# Altium PCB PAY_IFP_V1.PcbDoc (part 3 of 5)
Units mil, origin at the board's own origin, x right, y up, seen from the top; angles counter-clockwise.
Board outline 3661.42 x 3543.31 mil, 6 copper layers (L1 TOP, L2 GND 1, L3 SIGNAL, L4 PWR, L5 GND 2, L6 BOT), stack 59.685 mil thick; 511 components, 371 nets, 2264 pads, 383 vias.
Unrouted connection lines stored in the file: 1001.
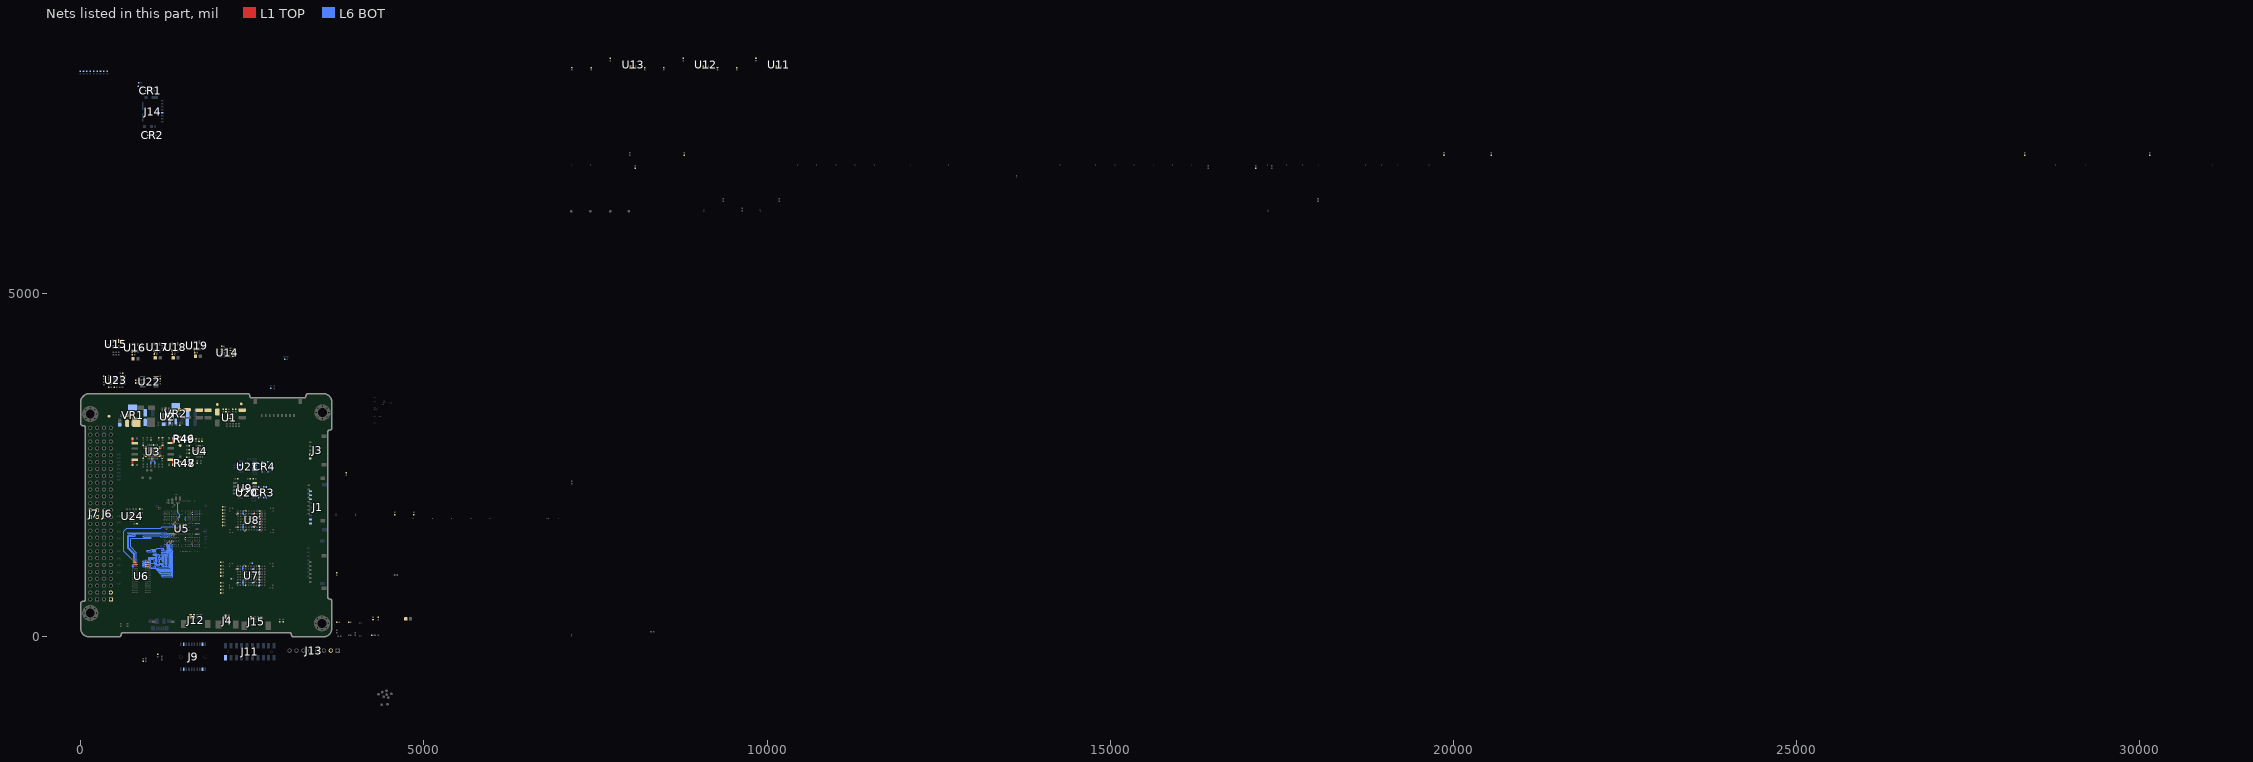
[diagram p2: the nets of this part, all layers, seen from the top]

## Via types
v1: diameter 13.78, hole 5.91, L1 TOP to L6 BOT, 276 vias
v2: diameter 13.78, hole 7.87, L1 TOP to L6 BOT, 71 vias
v3: diameter 15.75, hole 7.87, L1 TOP to L6 BOT, 25 vias
v4: diameter 15.75, hole 7.87, L1 TOP to L6 BOT, tented both sides, 9 vias
v5: diameter 13.78, hole 7.87, L1 TOP to L6 BOT, tented both sides, 2 vias

## Nets (pads, with @x,y where several pads share a name; then routed paths per layer and width w, separated by ;. In a path a pad name is that pad's centre, name@x,y a point inside that pad or via, vN(x,y) a via of type N, cw(c..) or ccw(c..) an arc to the next point about the centre after c; other vN are vias at no path point) (continued)
DCDC4: (continued)
  L1 TOP w31.5: L5.2@1314.37,2824.8 1343.9,2824.8 1348.19,2829.1 C32.1@1348.19,2893.7
DDR_A0: U5.W6 U6.N3 | length 1341.6
  L1 TOP w4.92: U6.N3@948.49,1024.02 v1(964.24,1039.77) ; v1(1335.3,1357.68) U5.W6@1348.09,1370.48
  L6 BOT w4.92: v1(964.24,1039.77) 960.3,1043.7 911.09,1043.7 907.15,1039.77 907.15,1027.96 911.09,1024.02 997.7,1024.02 1003.61,1024.02 1010.5,1017.13 1010.5,1007.29 1021.32,996.46 1084.31,996.46 1163.06,917.72 1292.98,917.72 1296.91,913.78 1296.91,901.97 1292.98,898.04 1186.68,898.04 1182.74,894.1 1182.74,882.29 1186.68,878.35 1340.22,878.35 1344.16,882.29 1344.16,1244.49 1335.3,1253.35 1335.3,1283.36 1337.11,1285.17 1337.11,1346.46 1336.99,1346.57 1336.99,1355.99 v1(1335.3,1357.68)
DDR_A1: U5.P6 U6.P7 | length 1340.7
  L1 TOP w4.92: v1(806.76,1039.77) U6.P7@822.5,1055.52 ; v1(1335.3,1485.63) U5.P6@1348.09,1498.43
  L6 BOT w3.94: 1280.53,1474.31 1302.52,1474.31 1304,1472.84 1315.42,1472.84 1315.91,1473.33 1323,1473.33 v1(1335.3,1485.63)
  L6 BOT w4.92: v1(806.76,1039.77) 812.66,1045.67 812.66,1228.74 729.98,1311.42 729.98,1429.53 733.92,1433.47 1021.32,1433.47 1025.26,1437.41 1025.26,1449.22 1021.32,1453.15 918.96,1453.15 915.02,1457.09 915.02,1468.9 918.96,1472.84 1155.18,1472.84 1166.99,1461.03 1261.48,1461.03 1274.77,1474.31 1280.53,1474.31
DDR_A2: U5.V5 U6.P3 | length 1340.7
  L1 TOP w4.92: U6.P3@948.49,1055.52 948.49,1068.31 951.44,1071.26 v1(964.24,1071.26) ; v1(1309.71,1383.27) U5.V5@1322.5,1396.07
  L6 BOT w4.92: v1(964.24,1071.26) 960.3,1075.2 911.09,1075.2 907.15,1071.26 907.15,1059.45 911.09,1055.52 1012.46,1055.52 1027.23,1070.28 1061.68,1070.28 1076.44,1055.52 1096.13,1055.52 1115.81,1035.83 1143.37,1035.83 1163.06,1055.52 1170.93,1055.52 1178.8,1047.64 1178.8,1035.83 1186.68,1027.96 1292.98,1027.96 1296.91,1024.02 1296.91,1012.21 1292.98,1008.27 1135.5,1008.27 1131.56,1004.33 1131.56,992.52 1135.5,988.59 1308.72,988.59 1312.66,992.52 1312.66,1224.81 1304.79,1232.68 1304.79,1260.24 1295.93,1269.1 1295.93,1320.2 1298.66,1322.94 1298.66,1363.59 1297.68,1364.58 1297.68,1371.24 v1(1309.71,1383.27)
DDR_A3: U5.V6 U6.N2 | length 1340
  L1 TOP w4.92: U6.N2@979.98,1024.02 v1(995.73,1039.77) ; v1(1334.32,1383.68) 1335.01,1383.68 1347.4,1396.07 U5.V6@1348.09,1396.07
  L6 BOT w4.92: v1(995.73,1039.77) 1014.43,1039.77 1020.34,1033.86 1020.34,1015.16 1027.23,1008.27 1064.63,1008.27 1072.5,1016.15 1072.5,1031.89 1076.44,1035.83 1092.19,1035.83 1096.13,1031.89 1096.13,1008.27 1127.62,976.78 1143.37,961.03 1151.24,961.03 1163.06,972.84 1308.72,972.84 1312.66,968.9 1312.66,957.09 1308.72,953.15 1166.99,953.15 1163.06,949.22 1163.06,937.41 1166.99,933.47 1304.79,933.47 1308.72,929.53 1308.72,898.04 1312.66,894.1 1324.47,894.1 1328.41,898.04 1328.41,1232.68 1320.54,1240.55 1320.54,1268.11 1306.76,1281.89 1306.76,1317.11 1308.5,1318.86 1308.5,1356.48 1334.32,1382.29 v1(1334.32,1383.68)
DDR_A4: U5.R6 U6.P8 | length 1327.9
  L1 TOP w4.92: v1(775.26,1039.77) U6.P8@791.01,1055.52 ; U5.R6@1348.09,1472.84 v1(1360.89,1485.63)
  L6 BOT w4.92: v1(775.26,1039.77) 775.26,1027.96 770.34,1023.04 754.59,1023.04 751.71,1025.92 751.71,1036.4 771.81,1056.5 782.15,1056.5 790.52,1064.87 790.52,1085.53 785.1,1090.95 785.1,1213 698.49,1299.61 698.49,1459.06 704.39,1464.96 789.04,1464.96 792.98,1468.9 792.98,1480.71 789.04,1484.65 777.23,1484.65 773.29,1488.59 773.29,1500.4 777.23,1504.33 1163.06,1504.33 1182.74,1484.65 1253.61,1484.65 1268.37,1499.41 1302.32,1499.41 1303.8,1500.89 1315.62,1500.89 1316.6,1499.91 1346.62,1499.91 v1(1360.89,1485.63)
DDR_A5: U5.W4 U6.P2 | length 1340.5
  L1 TOP w4.92: U6.P2@979.98,1055.52 992.78,1055.52 995.73,1058.47 v1(995.73,1071.26) ; v1(1284.39,1357.68) 1293.96,1357.68 1296.91,1360.63 U5.W4@1296.91,1370.48
  L6 BOT w4.92: v1(995.73,1071.26) 1007.54,1071.26 1020.34,1084.06 1020.34,1125.4 1029.2,1134.26 1060.69,1134.26 1072.5,1122.44 1072.5,1087.01 1088.25,1071.26 1104,1071.26 1119.75,1055.52 1135.5,1055.52 1155.18,1075.2 1186.68,1075.2 1194.55,1067.33 1194.55,1047.64 1198.49,1043.7 1214.24,1043.7 1218.17,1047.64 1218.17,1177.56 1222.11,1181.5 1233.92,1181.5 1237.86,1177.56 1237.86,1047.64 1241.8,1043.7 1253.61,1043.7 1257.54,1047.64 1257.54,1177.56 1261.48,1181.5 1273.29,1181.5 1277.23,1177.56 1277.23,1047.64 1281.17,1043.7 1292.98,1043.7 1296.91,1047.64 1296.91,1216.93 1292.98,1220.87 1292.98,1251.65 1284.39,1260.24 v1(1284.39,1357.68)
DDR_A6: U5.P7 U6.R8 | length 1338.9
  L1 TOP w4.92: v1(775.26,1071.26) 787.07,1071.26 791.01,1075.2 U6.R8@791.01,1087.01 ; v1(1360.89,1511.22) U5.P7@1373.69,1498.43
  L6 BOT w4.92: v1(775.26,1071.26) 775.26,1087.01 773.29,1088.98 773.29,1201.18 686.68,1287.8 686.68,1475.79 691.6,1480.71 752.62,1480.71 757.54,1485.63 757.54,1495.48 752.62,1500.4 692.58,1500.4 686.68,1506.3 686.68,1514.18 692.58,1520.08 1243.76,1520.08 1253.11,1510.73 1256.55,1510.73 1257.54,1509.75 1298.74,1509.75 1299.72,1510.73 1319.7,1510.73 1320.68,1509.75 1339.24,1509.75 1340.72,1511.22 v1(1360.89,1511.22)
DDR_A7: U5.W2 U6.R2 | length 1336.1
  L1 TOP w3.94: v1(1233.92,1358.67) U5.W2@1245.73,1370.48
  L1 TOP w4.92: U6.R2@979.98,1087.01 979.98,1099.81 982.94,1102.76 v1(995.73,1102.76)
  L6 BOT w4.92: v1(995.73,1102.76) 995.73,1156.89 1000.65,1161.81 1096.13,1161.81 1100.06,1165.75 1100.06,1181.5 1096.13,1185.44 1064.63,1185.44 1060.69,1189.37 1060.69,1201.18 1064.63,1205.12 1096.13,1205.12 1100.06,1209.06 1100.06,1220.87 1096.13,1224.81 1064.63,1224.81 1060.69,1228.74 1060.69,1240.55 1064.63,1244.49 1088.25,1244.49 1092.19,1248.43 1092.19,1260.24 1088.25,1264.18 1052.82,1264.18 1048.88,1260.24 1048.88,1250.4 1039.04,1240.55 970.14,1240.55 966.2,1244.49 966.2,1256.3 970.14,1260.24 1018.86,1260.24 1038.55,1279.92 1103.02,1279.92 1114.83,1291.74 1211.19,1291.74 1214.08,1288.85 1214.08,1279.52 1214.59,1279.01 1214.59,1274.93 1211.7,1272.05 1184.71,1272.05 1180.77,1268.11 1180.77,1256.3 1184.71,1252.37 1245.73,1252.37 1249.67,1248.43 1249.67,1236.62 1245.73,1232.68 1182.74,1232.68 1178.8,1228.74 1178.8,1216.93 1182.74,1213 1257.54,1213 1264.43,1219.89 1264.43,1340.95 1246.72,1358.67 v1(1233.92,1358.67)
DDR_A8: U5.L8 U6.T8 | length 1339.7
  L1 TOP w3.94: U5.L8@1399.28,1575.2 v1(1412.07,1588)
  L1 TOP w4.92: v1(735.89,1141.15) 768.37,1141.15 U6.T8@791.01,1118.51
  L6 BOT w4.92: v1(735.89,1141.15) 629.59,1247.44 629.59,1539.91 672.76,1583.07 1169.94,1583.07 1189.23,1602.36 1371.13,1602.36 1385.5,1588 v1(1412.07,1588)
DDR_A9: U5.V4 U6.R3 | length 1339.4
  L1 TOP w4.92: U6.R3@948.49,1087.01 948.49,1099.81 951.44,1102.76 v1(964.24,1102.76) ; v1(1284.12,1383.27) U5.V4@1296.91,1396.07
  L6 BOT w4.92: v1(964.24,1102.76) 960.3,1106.7 911.09,1106.7 907.15,1102.76 907.15,1090.95 911.09,1087.01 954.39,1087.01 1004.59,1087.01 1010.5,1092.92 1010.5,1143.11 1014.93,1147.54 1086.78,1147.54 1092.19,1142.13 1092.19,1094.89 1097.11,1089.96 1106.95,1089.96 1111.87,1094.89 1111.87,1197.25 1115.81,1201.18 1127.62,1201.18 1131.56,1197.25 1131.56,1157.88 1139.43,1150 1139.43,1138.19 1131.56,1130.32 1131.56,1094.89 1136.48,1089.96 1146.32,1089.96 1151.24,1094.89 1151.24,1130.32 1155.18,1134.26 1166.99,1134.26 1170.93,1138.19 1170.93,1150 1166.99,1153.94 1155.18,1153.94 1151.24,1157.88 1151.24,1193.31 1155.18,1197.25 1178.8,1197.25 1186.68,1189.37 1186.68,1098.82 1192.58,1092.92 1200.46,1092.92 1206.36,1098.82 1206.36,1189.37 1214.24,1197.25 1269.35,1197.25 1274.28,1202.17 1274.28,1346.59 1261.48,1359.38 1261.48,1366.54 1264.43,1369.49 1270.34,1369.49 v1(1284.12,1383.27)

## Text inside footprints (layer, text, board x,y; h text height)
C38: Bottom Courtyard "C" at 1736.18,1830.26 h7.87
C39: Bottom Courtyard "C" at 1588.28,1745.14 h7.87 r180
C40: Bottom Courtyard "C" at 1638.76,1712.57 h7.87 r270
C41: Bottom Courtyard "C" at 1724.18,1724.26 h7.87
C42: Bottom Courtyard "C" at 1601.28,1677.14 h7.87 r180
C44: Bottom Courtyard "C" at 1217.28,1840.14 h7.87 r180
C45: Bottom Courtyard "C" at 1332.28,1694.14 h7.87 r180
C46: Bottom Courtyard "C" at 1595.18,1712.26 h7.87
C47: Bottom Courtyard "C" at 1224.28,1656.14 h7.87 r180
C48: Top Courtyard "C" at 4069.82,7.24 h7.87
C49: Bottom Courtyard "C" at 1417.17,1642.15 h7.87 r90
C50: Bottom Courtyard "C" at 1555.7,1622.37 h7.87
C51: Bottom Courtyard "C" at 1646.18,1621.26 h7.87
C52: Bottom Courtyard "C" at 1554.29,1521.25 h7.87 r270
C53: Bottom Courtyard "C" at 1648.18,1520.26 h7.87
C54: Bottom Courtyard "C" at 1595.17,1463.15 h7.87 r90
C55: Bottom Courtyard "C" at 1590.28,1413.14 h7.87 r180
C56: Bottom Courtyard "C" at 1663.17,1424.15 h7.87 r90
C57: Bottom Courtyard "C" at 1724.18,1417.26 h7.87
C58: Bottom Courtyard "C" at 1724.18,1396.26 h7.87
C60: Bottom Courtyard "C" at 1523.29,1404.25 h7.87 r270
C61: Bottom Courtyard "C" at 1723.52,1571.26 h7.87
C62: Bottom Courtyard "C" at 1633.17,1824.15 h7.87 r90
C63: Bottom Courtyard "C" at 1726.18,1649.26 h7.87
C64: Bottom Courtyard "C" at 1626.29,1326.25 h7.87 r270
C65: Bottom Courtyard "C" at 1429.17,1745.15 h7.87 r90
C66: Bottom Courtyard "C" at 1531.17,1747.15 h7.87 r90
C67: Bottom Courtyard "C" at 1724.18,1494.26 h7.87
C68: Bottom Courtyard "C" at 1225.39,1579.14 h7.87 r180
C70: Bottom Courtyard "C" at 1393.18,1668.26 h7.87
C72: Bottom Courtyard "C" at 1549.29,1327.25 h7.87 r270
C73: Bottom Courtyard "C" at 1339.18,1737.26 h7.87
C74: Bottom Courtyard "C" at 1300.28,1631.14 h7.87 r180
C75: Bottom Courtyard "C" at 1621.17,1463.49 h7.87 r90
C76: Bottom Courtyard "C" at 1472.29,1327.25 h7.87 r270
C77: Bottom Courtyard "C" at 1227.28,1740.14 h7.87 r180
C78: Bottom Courtyard "C" at 1409.17,1757.15 h7.87 r90
C79: Top Courtyard "C" at 1255.91,1945.87 h7.87 r90
C80: Top Courtyard "C" at 1333.66,2019.69 h7.87 r180
C81: Top Courtyard "C" at 1443.41,2066.93 h7.87
C82: Top Courtyard "C" at 1390.51,2075.43 h7.87 r180
C84: Bottom Courtyard "C" at 991.56,753.33 h7.87 r270
C85: Bottom Courtyard "C" at 763.43,744.24 h7.87 r90
C86: Bottom Courtyard "C" at 817.45,816.35 h7.87
C87: Bottom Courtyard "C" at 983.45,894.35 h7.87
C88: Bottom Courtyard "C" at 822.43,928.24 h7.87 r90
C89: Bottom Courtyard "C" at 1048.56,1044.33 h7.87 r270
C90: Bottom Courtyard "C" at 4279.36,3181.21 h7.87 r180
C91: Bottom Courtyard "C" at 4362.6,3204.34 h7.87
C92: Bottom Courtyard "C" at 4279.36,3118.21 h7.87 r180
C93: Bottom Courtyard "C" at 1046.93,658.09 h7.87 r270
C94: Bottom Courtyard "C" at 778.21,660.95 h7.87
C95: Bottom Courtyard "C" at 4519.93,3403.34 h7.87
C96: Bottom Courtyard "C" at 4279.36,3491.21 h7.87 r180
C97: Bottom Courtyard "C" at 4470.93,3399.34 h7.87
C98: Bottom Courtyard "C" at 4279.36,3433.21 h7.87 r180
C99: Bottom Courtyard "C" at 4428.27,3411.34 h7.87
C100: Bottom Courtyard "C" at 1203.52,1352.26 h7.87
C101: Bottom Courtyard "C" at 4406.27,3380.34 h7.87
C102: Bottom Courtyard "C" at 4279.36,3348.21 h7.87 r180
C104: Bottom Courtyard "C" at 1305.28,1528.14 h7.87 r180
C105: Bottom Courtyard "C" at 1385.28,1505.14 h7.87 r180
C106: Bottom Courtyard "C" at 1467.17,1565.15 h7.87 r90
C107: Bottom Courtyard "C" at 1493.17,1564.15 h7.87 r90
C108: Bottom Courtyard "C" at 1531.18,1491.26 h7.87
C109: Bottom Courtyard "C" at 1218.28,1502.14 h7.87 r180
C110: Bottom Courtyard "C" at 1373.29,1418.25 h7.87 r270
C111: Bottom Courtyard "C" at 1358.28,1464.14 h7.87 r180
C112: Bottom Courtyard "C" at 1434.29,1405.25 h7.87 r270
C113: Bottom Courtyard "C" at 1211.28,1425.14 h7.87 r180
C114: Bottom Courtyard "C" at 1314.17,1437.15 h7.87 r90
C115: Bottom Courtyard "C" at 1337.17,1438.15 h7.87 r90
C116: Bottom Courtyard "C" at 1395.29,1327.25 h7.87 r270
C117: Bottom Courtyard "C" at 1246.29,1315.25 h7.87 r270
C118: Bottom Courtyard "C" at 1327.17,1318.15 h7.87 r90
C120: Top Courtyard "C" at 9904.71,6207.22 h7.87 r90
C122: Top Courtyard "C" at 9083.71,6207.22 h7.87 r90
C123: Bottom Courtyard "C" at 4421.27,3434.34 h7.87
C124: Bottom Courtyard "C" at 4279.36,3215.21 h7.87 r180
U3: Top Assembly "1" at 1127.13,2786.57 h30 r180
U5: Top Assembly "A1" at 1208.33,1804.53 h39.37
U7: Top Overlay "10" at 2846.44,685.59 h50; Top Overlay "1" at 2854.32,1043.86 h50; Top Overlay "U" at 2137.78,1205.27 h50 r270; Top Overlay "A" at 2779.52,1209.21 h50 r270; Top Assembly "10" at 2865.74,688.15 h50; Top Assembly "1" at 2865.74,1042.48 h50; Top Assembly "U" at 2144.28,1217.81 h50 r270; Top Assembly "A" at 2774.2,1217.81 h50 r270
U8: Top Overlay "A" at 2784.77,2015.67 h50 r270; Top Overlay "U" at 2143.03,2011.73 h50 r270; Top Overlay "1" at 2859.57,1850.31 h50; Top Overlay "10" at 2851.7,1492.05 h50; Top Assembly "A" at 2779.45,2024.27 h50 r270; Top Assembly "U" at 2149.53,2024.27 h50 r270; Top Assembly "1" at 2870.99,1848.94 h50; Top Assembly "10" at 2870.99,1494.61 h50
U23: Mechanical 13 "*" at 452.25,3767.9 h50